# EAGLE board 1.5v-led-flasher-v0 (EAGLE 5.07)
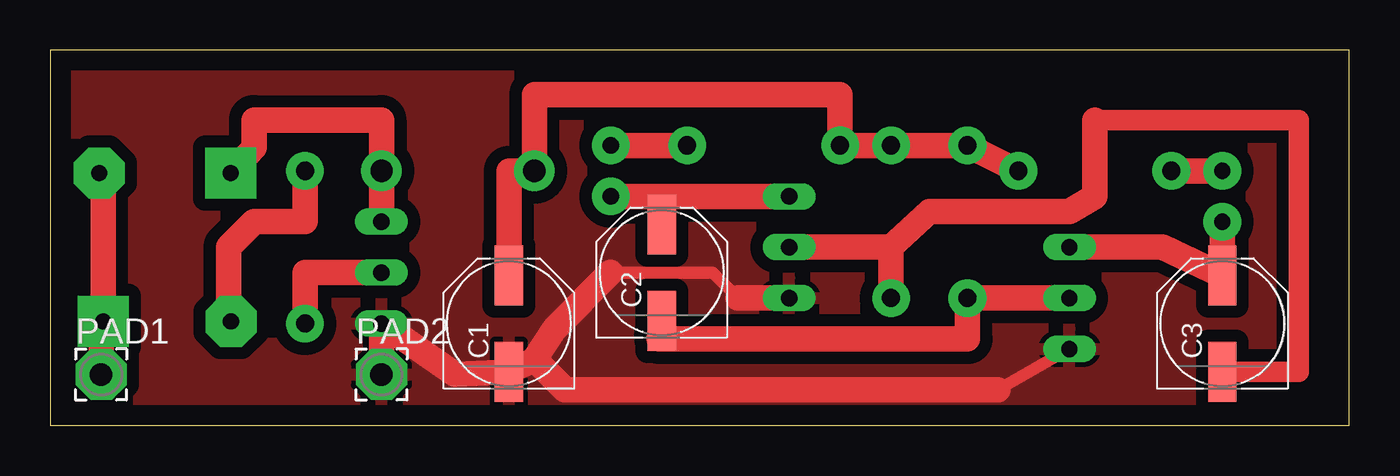
[diagram p0: board, top side]
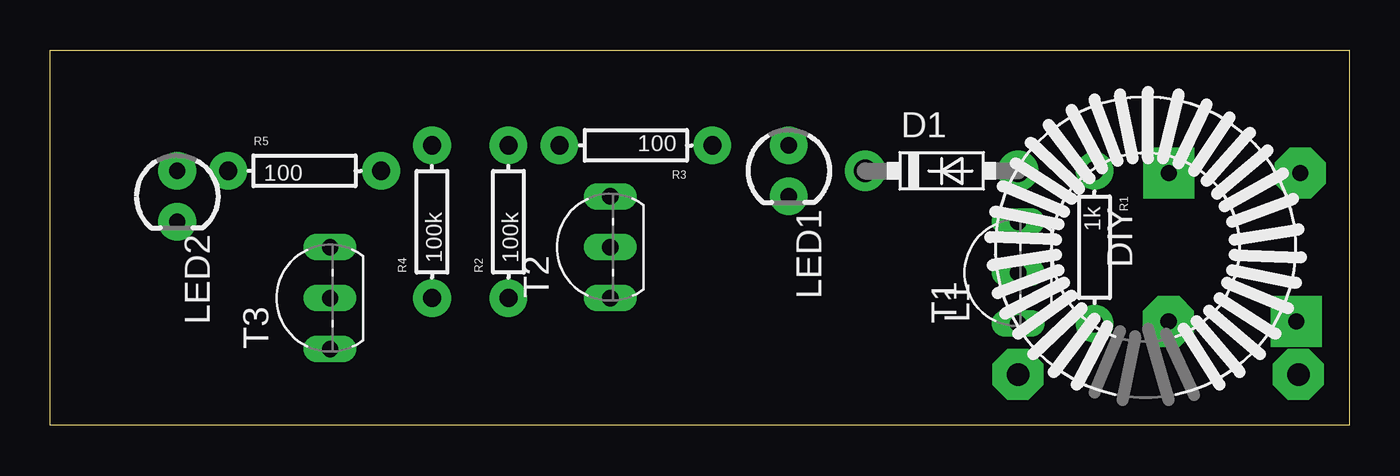
[diagram p1: board, bottom side, seen from below]

Size 64.75 x 18.72 mm. Coordinates in mm from the lower left corner, seen from the top.
Outline: 0,0 64.75,0 64.75,18.72 0,18.72 0,0
Copper layers (1*16): Top 0.035mm / dielectric 1.5mm / Bottom 0.035mm
Design rules "default": minimum track width 10mil, minimum drill 24mil, track to track 8mil, track to pad 8mil, pad to pad 8mil, via to via 8mil, smd to smd 8mil, copper to edge 40mil, drill to drill 8mil, minimum pad ring 10mil, minimum via ring 8mil, stop-mask expansion 4mil, vias tented up to drill 0mil, thermal gap 10mil

## Footprints (pad centres in the part's own frame; a part is rotated, then mirrored left to right if it is on the bottom)
PANASONIC_D = smd 3 x 1.4: + 2.4,0; - -2.4,0
DO41-7.6 = drill 1.1 pad 2.032 round: A 3.81,0; C -3.81,0
DIGITAL-TOY-COIL-TRANSFORMER = drill 0.8 pad 2.54 square: 1 -3.69,-7.52; 3 3.69,-1.17 | drill 0.8 pad 2.54 octagon: 2 -3.71,-1.15; 4 3.69,-7.72
LED3MM = drill 0.813 pad 1.88 round: A -1.27,0; K 1.27,0
2,54/1,1 = drill 1.118 pad 2.54 octagon: 1 0,0
AXIAL-0.3 = drill 0.9 pad 1.88 round: P$1 -3.81,0; P$2 3.81,0
TO92-EBC = drill 0.813 long: B 0,-1.27; C 2.54,-1.27; E -2.54,-1.27

## Placement (x,y rotation side)
C1  100uf  [PANASONIC_D]  22.86,5.08 90 top
C2  47uf  [PANASONIC_D]  30.48,7.62 90 top
C3  47uf  [PANASONIC_D]  58.42,5.08 90 top
D1  1N5819-B  [DO41-7.6]  20.32,12.7 0 bottom
L1  R2610XKS  [DIGITAL-TOY-COIL-TRANSFORMER]  10.16,8.89 90 bottom
LED1  red  [LED3MM]  27.94,12.7 270 bottom
LED2  green  [LED3MM]  58.42,11.43 270 bottom
PAD1  WIREPAD2,54/1,1  [2,54/1,1]  2.54,2.54 0 top
PAD2  WIREPAD2,54/1,1  [2,54/1,1]  16.51,2.54 0 top
R1  1k  [AXIAL-0.3]  12.7,8.89 270 bottom
R2  100k  [AXIAL-0.3]  41.91,10.16 90 bottom
R3  100  [AXIAL-0.3]  35.56,13.97 180 bottom
R4  100k  [AXIAL-0.3]  45.72,10.16 90 bottom
R5  100  [AXIAL-0.3]  52.07,12.7 0 bottom
T1  8050  [TO92-EBC]  17.78,7.62 90 bottom
T2  9013  [TO92-EBC]  38.1,8.89 90 bottom
T3  9013  [TO92-EBC]  52.07,6.35 90 bottom

## Library data of the parts
C1-C3 = SparkFun
D1 L1 LED1 LED2 R1-R5 T1-T3 = digital-toy
PAD1 PAD2 = wirepad

## Nets
-VCC: L1.1 L1.4 PAD1.1
GND: C1.- PAD2.1 T1.E T2.E T3.E
N$1: R1.P$2 T1.B
N$2: L1.2 R1.P$1
N$3: D1.A L1.3 T1.C
N$4: C1.+ D1.C R2.P$2 R3.P$2 R4.P$2 R5.P$2
N$6: LED1.A R3.P$1
N$7: C2.+ LED1.K T2.C
N$8: LED2.A R5.P$1
N$9: C3.+ LED2.K T3.C
N$10: C3.- R2.P$1 T2.B
N$13: C2.- R4.P$1 T3.B

## Tracks (layer width: path | path; a pad name or v marks a point on that pad's centre or on a via)
-VCC
  Top 1.27: PAD1.1 2.54,5.1 L1.1 2.64,12.38 L1.4
GND
  Top 0.61: 47.24,1.78 T3.E | 34.29,6.35 33.02,7.62 27.94,7.62
  Top 1.27: 47.24,1.78 25.65,1.78 24.13,3.3 | PAD2.1 T1.E 20.18,2.54 C1.- 24.13,3.3 | 24.13,3.3 25.15,4.83 27.94,7.62 | 34.29,6.35 T2.E
  pour Top (isolate 0.61): 1.27,25.4 68.58,25.4 72.39,19.05 72.39,-8.89 67.31,-10.16 0,-7.62 -5.08,-7.62 -5.08,26.67
N$1
  Top 1.27: T1.B 12.7,7.62 R1.P$2
N$2
  Top 0.61: L1.2 8.89,5.3
  Top 1.27: R1.P$1 12.7,10.16 10.16,10.16 8.89,8.89 8.89,5.3
N$3
  Top 1.27: T1.C D1.A 16.51,15.24 10.16,15.24 10.16,13.85 L1.3
N$4
  Top 1.27: R5.P$2 R4.P$2 R2.P$2 R3.P$2 39.37,16.51 24.13,16.51 D1.C 22.86,12.7 C1.+
N$6
  Top 1.27: LED1.A R3.P$1
N$7
  Top 1.27: 30.48,11.43 LED1.K | C2.+ 30.48,11.43 | 30.48,11.43 T2.C
N$8
  Top 1.27: R5.P$1 LED2.A
N$9
  Top 1.27: T3.C 55.42,8.89 C3.+ LED2.K
N$10
  Top 1.016: 52.07,15.24 62.23,15.24 62.23,2.67 C3.-
  Top 1.27: 52.07,15.24 52.07,11.43 50.8,10.67 43.81,10.67 41.91,8.89 | T2.B 41.91,8.89 | 41.91,8.89 R2.P$1
N$13
  Top 1.27: T3.B R4.P$1 45.72,4.32 30.35,4.32 C2.-